# Altium PCB PCB2.PcbDoc (part 2 of 2)
Units mil, origin at the board's own origin, x right, y up, seen from the top; angles counter-clockwise.
Board outline 2244.09 x 1732.28 mil, 4 copper layers (Top Layer, GND, PWR, Bottom Layer), stack 61.58 mil thick; 44 components, 99 nets, 307 pads, 123 vias.
Unrouted connection lines stored in the file: 48.
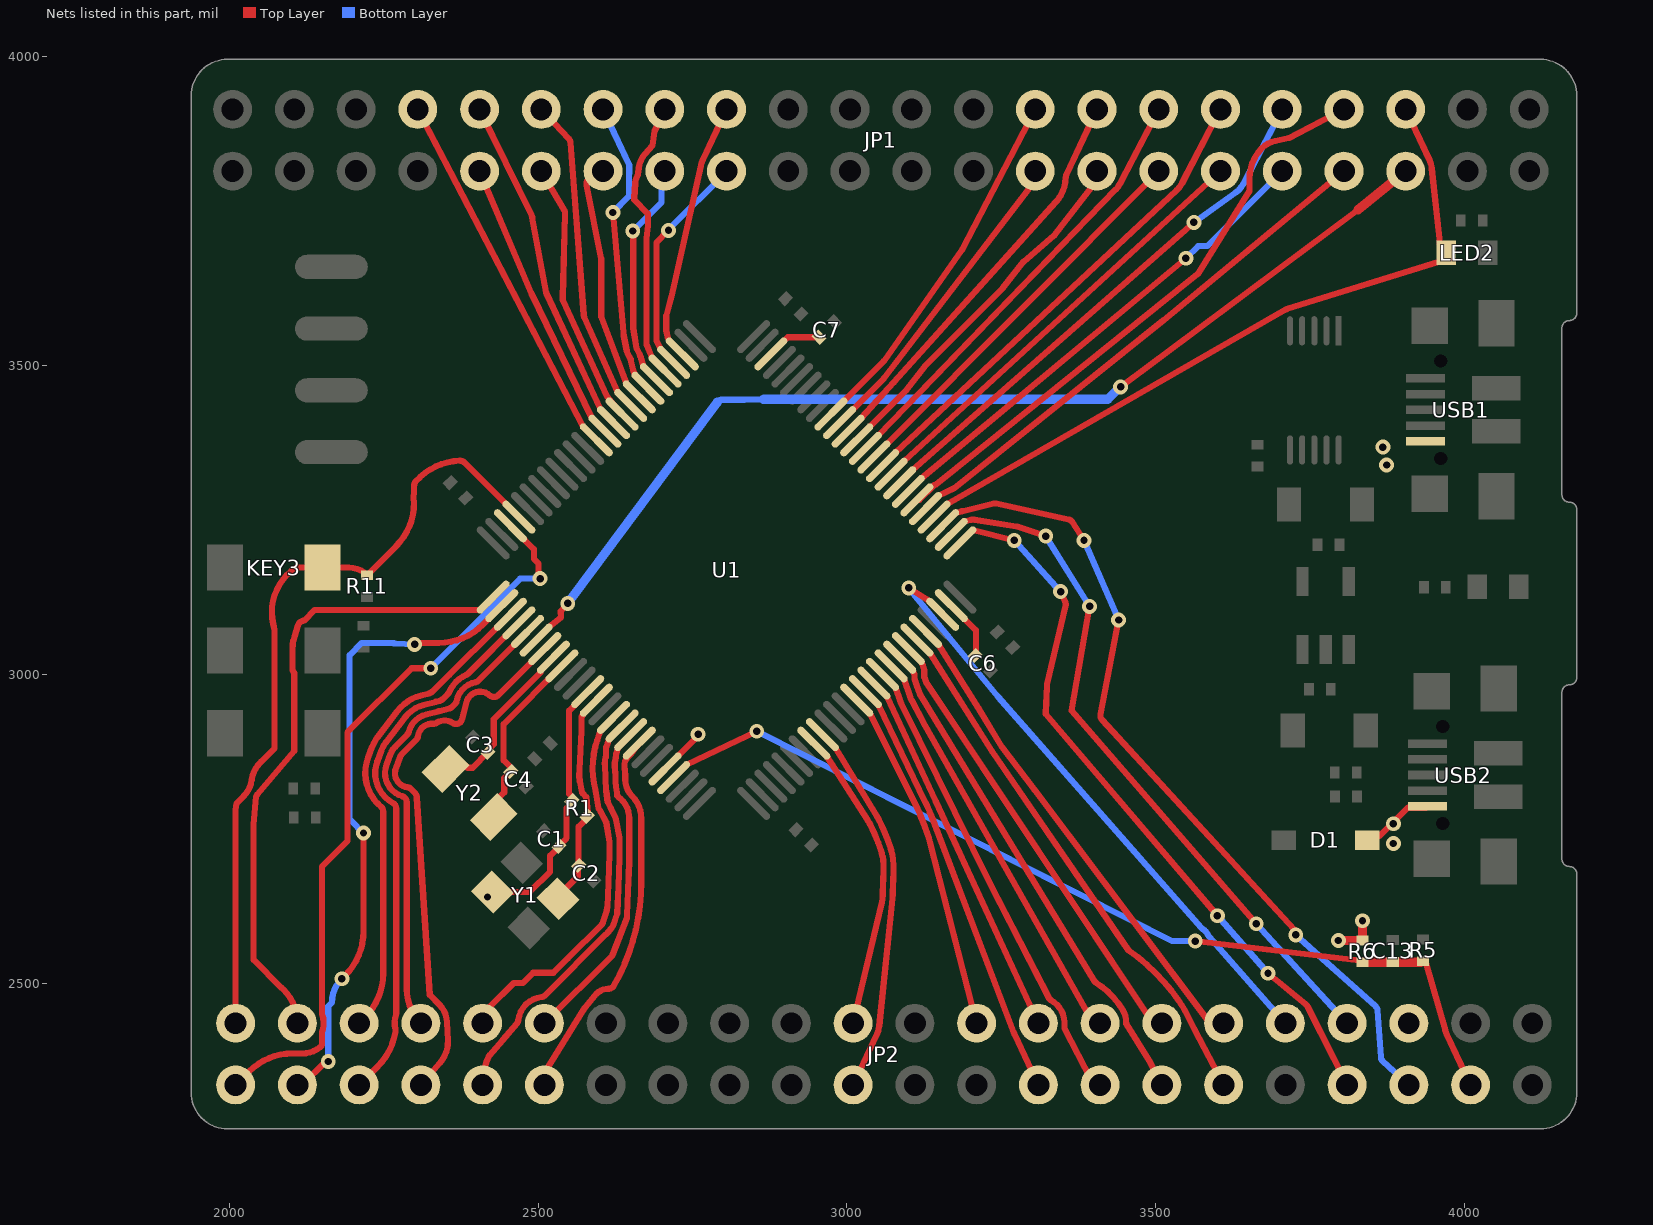
[diagram p4: the nets of this part, all layers, seen from the top]

## Via types
v1: diameter 24, hole 12, Top Layer to Bottom Layer, tented both sides, 64 vias
v2: diameter 24, hole 12, Top Layer to Bottom Layer, 59 vias

## Nets (pads, with @x,y where several pads share a name; then routed paths per layer and width w, separated by ;. In a path a pad name is that pad's centre, name@x,y a point inside that pad or via, vN(x,y) a via of type N, cw(c..) or ccw(c..) an arc to the next point about the centre after c; other vN are vias at no path point) (continued)
PB11: JP2.9 U1.48 | length 1002.7
  Top Layer w10: v2(3100,3140) 3134.21,3118.18 U1.48@3155.09,3097.3
  Bottom Layer w10: v2(3100,3140) 3244.23,2964.4 ccw(c3262,2979) 3244.73,2963.81 3574.41,2589.11 ; 3574.44,2589.07 ccw(c3581.92,2595.71) 3576.47,2587.33 cw(c3564,2568) 3584.49,2578.46 3584.89,2577.66 ccw(c3593.8,2582.21) 3586.26,2575.64 JP2.9@3710,2435
PB12: JP2.8 U1.51 | length 1193.2
  Top Layer w10: U1.51@3182.93,3212.85 3203.81,3233.73 v2(3271,3217) ; 3323.96,2982.05 3322,2936 v2(3600,2609) ; 3323.96,2982.08 cw(c3333.95,2981.62) 3324.22,2983.93 3354.22,3110.69 ; v2(3346,3134) 3353.61,3117.1 cw(c3344.49,3113) 3354.23,3110.73 ; v2(3682,2516) 3743.38,2465.34 cw(c3737.01,2457.62) 3745.93,2462.16 ; 3745.95,2462.12 JP2.8@3810,2335
  Bottom Layer w10: v2(3271,3217) v2(3346,3134) ; v2(3600,2609) v2(3682,2516)
PB13: JP2.7 U1.52 | length 1145.7
  Top Layer w10: U1.52@3169.01,3226.77 3189.89,3247.65 3199.67,3250.12 cw(c3203.81,3233.73) 3206.43,3250.43 3274.57,3239.72 cw(c3271,3217) 3278.38,3238.78 v2(3322,3224) ; v2(3393,3110) 3364,2941 v2(3663,2596)
  Bottom Layer w10: v2(3322,3224) v2(3393,3110) ; v2(3663,2596) JP2.7@3810,2435
PB14: JP2.6 U1.53 | length 1357.2
  Top Layer w10: U1.53@3155.09,3240.69 3175.97,3261.57 3185.75,3264.04 cw(c3189.89,3247.65) 3185.96,3264.09 3237.77,3276.47 cw(c3240.09,3266.74) 3242.24,3276.51 3358.94,3250.89 cw(c3356.8,3241.12) 3365.23,3246.49 v2(3384,3217) ; v2(3440,3088) 3410.73,2935.26 ccw(c3420.55,2933.38) 3413.18,2926.62 v2@3724.6,2586.89 ; v2@3724.63,2586.86 cw(c3717.23,2580.13) v2(3727,2578)
  Bottom Layer w10: v2(3384,3217) v2(3440,3088) ; v2(3727,2578) 3855.98,2462.7 cw(c3849.31,2455.25) 3859.29,2455.96 3864.72,2379.99 ; 3864.72,2379.95 ccw(c3874.69,2380.7) 3867.92,2373.34 JP2.6@3910,2335
PB15: JP1.5 LED2.2 U1.54 | length 1187.2
  Top Layer w10: U1.54@3141.17,3254.61 3162.05,3275.49 3711.04,3591.08 3712.17,3591.43 3960.25,3668.31 LED2.2@3971,3683 3960.25,3697.69 3947.26,3819.51 ccw(c3905,3815) 3943.47,3833.06 JP1.5@3905,3915
PC0: JP2.35 U1.15 | length 618.4
  Top Layer w10: JP2.35@2410,2435 cw(c2446.21,2435) 2420.61,2460.61 2460,2500 2475,2500 2491.67,2516.67 2524.67,2516.67 2548,2540 2602.62,2594.62 ccw(c2595.55,2601.69) 2605.11,2598.76 2611.13,2618.4 ccw(c2589.14,2625.14) 2611.97,2622.36 ; 2611.97,2622.4 2612.14,2623.76 2614.05,2662.31 2615.5,2709.47 2615.5,2728.53 2610.14,2760.49 2601.51,2776.8 ccw(c2591.79,2771.66) 2601.46,2776.9 ccw(c2591.79,2771.66) 2601.38,2777.03 2600.66,2778.34 2597.41,2783.1 2593.83,2807.24 2592.58,2812.14 cw(c2731.36,2847.55) 2595.63,2893.25 2601.07,2909.39 U1.15@2621.95,2930.27
PC1: JP2.36 U1.16 | length 683.5
  Top Layer w10: JP2.36@2410,2335 2410,2337.58 cw(c2510,2337.58) 2419.94,2381.05 cw(c2428.92,2376.65) 2421.36,2383.2 2442.08,2407.13 ccw(c2410,2435) 2442.32,2407.4 2465.45,2434.49 ccw(c2457.85,2440.99) 2467.78,2439.81 cw(c2510,2435) 2505.21,2477.22 ccw(c2504.01,2487.15) 2511.05,2480.05 2609.69,2578.69 2614.65,2584.03 ccw(c2539,2649.42) 2621.11,2592.35 2627.97,2612.61 2629.85,2655.48 2631.5,2702.85 2631.5,2735.15 2626.14,2764.46 2625.07,2768.18 2617.46,2783.59 2612.56,2793.05 2610.17,2811.25 2609.93,2811.92 2609.93,2817.45 ccw(c2599.93,2817.45) 2609.81,2818.97 cw(c2678.56,2829.56) 2609,2829.53 2609,2834.62 ccw(c2599,2834.62) 2608.98,2835.17 2608.98,2835.26 2607.96,2850.42 cw(c2656.75,2853.71) 2609.33,2865.68 2609.62,2866.82 ccw(c2599.93,2869.27) 2609.93,2869.23 2609.93,2881.26 2612.01,2887.26 2614.99,2895.47 U1.16@2635.87,2916.35
PC2: JP2.33 U1.17 | length 533.3
  Top Layer w10: JP2.33@2510,2435 2620.47,2545.47 2643.68,2605.7 2643.97,2609.98 2645.62,2648.63 2647.5,2696.22 2647.5,2766.75 ccw(c2604.97,2766.79) 2632.6,2799.13 2630.12,2801.25 cw(c2670.58,2840.03) 2628.17,2803.39 ; 2624.98,2835.75 cw(c2615,2835.12) 2625,2835.12 2625,2829.56 ccw(c2678.56,2829.56) 2626.02,2819.13 cw(c2616.21,2817.21) 2626.19,2817.81 2628.16,2803.43 ; 2624.98,2835.8 2623.93,2851.41 2623.92,2851.48 cw(c2656.75,2853.71) 2625.02,2862.42 ccw(c2599.93,2869.23) 2625.85,2867.29 2625.97,2868.89 cw(c2642.83,2867.63) 2626.44,2871.77 2628.91,2881.55 U1.17@2649.79,2902.43
PC3: JP2.34 U1.18 | length 620.9
  Top Layer w10: JP2.34@2510,2335 2510,2354.35 2573.88,2457.39 cw(c2610,2435) 2576.95,2461.72 2591,2479.11 cw(c2614.72,2461.07) 2614.12,2490.86 ccw(c2613.91,2500.86) 2620.99,2493.79 ccw(c2613.91,2500.86) 2622.59,2495.89 ccw(c2327.17,2663.85) 2667,2663.85 2667,2766.79 ccw(c2615.79,2766.79) 2652,2803 cw(c2678.56,2829.56) 2641,2829.56 2641,2836 2639.89,2852.5 cw(c2656.75,2853.71) 2644.77,2865.63 2649.11,2869.97 ccw(c2642,2877.01) 2649.99,2870.99 2661.18,2885.84 cw(c2669.17,2879.82) 2662.03,2886.83 U1.18@2663.71,2888.51
PC4: JP2.23 U1.33 | length 492.3
  Top Layer w10: U1.33@2946.3,2888.51 2967.18,2867.63 3033.85,2763.57 cw(c2985.01,2732.28) 3035.93,2760.05 3036.62,2758.8 cw(c2971.82,2723.06) 3037.53,2757.09 ; JP2.23@3010,2435 3056.55,2631.16 ccw(c3000.12,2644.55) 3058.09,2642.75 ccw(c3010.12,2644.28) 3058.1,2642.99 3059.25,2684.25 ccw(c2995.28,2686.17) 3059.28,2686.17 3059.28,2691.65 ccw(c2995.28,2691.65) 3056.37,2710.71 3055.97,2712.01 ccw(c3040.66,2707.34) 3055.95,2712.08 ; 3037.62,2756.91 cw(c3009.17,2742.27) 3037.66,2756.84 cw(c3023.43,2749.52) 3037.71,2756.74 cw(c3009.22,2742.18) 3037.73,2756.69 cw(c2994.98,2734.87) 3037.86,2756.44 cw(c2782.97,2626.66) 3055.86,2712.37 ; 3037.61,2756.94 ccw(c3023.39,2749.61) 3037.58,2757 ; 3055.9,2712.22 cw(c3025.36,2702.68) 3055.93,2712.14
PC5: JP2.24 U1.34 | length 610.4
  Top Layer w10: U1.34@2960.22,2902.43 2981.1,2881.55 3048.3,2770.62 cw(c2985.01,2732.28) 3049.99,2767.68 3050.63,2766.53 cw(c2971.82,2723.06) 3051.74,2764.45 ; JP2.24@3010,2335 3048.47,2416.94 ccw(c3010,2435) 3052.27,2430.6 3073.73,2636.9 ccw(c3000.12,2644.55) 3074.09,2642.25 ccw(c3010.12,2644.28) 3074.1,2642.56 3075.24,2683.77 ccw(c2995.28,2686.17) 3075.28,2686.17 3075.28,2691.65 ccw(c2995.28,2691.65) 3071.65,2715.47 3071.23,2716.8 ; 3051.77,2764.38 cw(c3023.39,2749.61) 3051.8,2764.33 cw(c3037.61,2756.94) 3051.83,2764.27 ; 3051.87,2764.19 cw(c3009.17,2742.27) 3051.9,2764.14 cw(c3023.43,2749.52) 3051.95,2764.05 cw(c3009.22,2742.18) 3052.1,2763.75 cw(c2782.97,2626.66) 3071.11,2717.19 ; 3071.15,2717.07 ccw(c3040.61,2707.51) 3071.13,2717.13 ; 3071.21,2716.89 ccw(c3025.38,2702.61) 3071.19,2716.95
PC6: JP1.16 U1.63 | length 589.6
  Top Layer w10: U1.63@3015.89,3379.89 3095.28,3459.27 3095.73,3459.72 3127.06,3500.02 3127.88,3500.95 3251.55,3624.62 3252.25,3625.32 3286.26,3668.38 3335.52,3710.59 3336.24,3711.31 3406.21,3801.3 3406.21,3805.36 JP1.16@3405,3815
PC7: JP1.15 U1.64 | length 666.2
  Top Layer w10: U1.64@3001.98,3393.81 3022.85,3414.68 3075.86,3472.9 3338.76,3765.42 ccw(c3294.4,3805.37) 3353.55,3797.3 3355.1,3808.71 JP1.15@3405,3915
PC8: JP1.18 U1.65 | length 520.7
  Top Layer w10: U1.65@2988.06,3407.72 3059.39,3479.06 3059.86,3479.53 3306.3,3801.15 3306.3,3805.2 JP1.18@3305,3815
PC9: JP1.17 U1.66 | length 597.9
  Top Layer w10: U1.66@2974.14,3421.64 3059.77,3507.28 3186.51,3687.5 3186.81,3688.09 JP1.17@3305,3915
PC10: JP1.27 U1.78 | length 420.9
  Top Layer w10: 2715.92,3611.63 2707.36,3580.66 2707.36,3557.54 2709.44,3546.88 2712.43,3539.96 U1.78@2733.31,3519.08 ; 2715.93,3611.65 cw(c2725.7,3609.55) 2715.94,3611.73 2763.53,3824.28 cw(c2805,3815) 2766.53,3833.06 JP1.27@2805,3915
PC11: JP1.28 U1.79 | length 367.2
  Top Layer w10: v2(2711,3719) 2691.36,3699.36 2691.36,3541.21 2698.51,3526.04 U1.79@2719.39,3505.16
  Bottom Layer w10: v2(2711,3719) 2711,3720 2805,3814 JP1.28@2805,3815
PC12: JP1.29 U1.80 | length 455.3
  Top Layer w10: JP1.29@2705,3915 2688.31,3879.45 2684.9,3856.61 2672.97,3842.93 ccw(c2705,3815) 2662.86,3820.46 2661.5,3809.95 ccw(c2705.22,3788.62) 2657.1,3795.82 2655.55,3771.3 2655.67,3768.73 2677.76,3746.29 2677.76,3727.24 2675.36,3705.99 2675.36,3534.58 2684.59,3512.12 U1.80@2705.47,3491.24
PC13: JP2.38 U1.7 | length 905.5
  Top Layer w10: JP2.38@2310,2335 2340.71,2370.43 ccw(c2299.93,2405.78) 2352.87,2395.31 ccw(c2305.69,2404.64) 2353.74,2406.69 2352.46,2436.81 ccw(c2310,2435) 2340.15,2464.95 2324.34,2480.87 2303.31,2800.41 2303.31,2800.83 ccw(c2293.31,2800.92) 2300.36,2808.01 2294.06,2814.32 ccw(c2286.99,2807.25) 2288.22,2817.17 cw(c2291,2840) 2269.45,2848.05 2276.01,2865.6 cw(c2291,2860) 2279.69,2871.31 2302.42,2894.04 ccw(c2295.38,2901.15) 2305.3,2899.9 cw(c2328.14,2897.14) 2329.62,2920.09 2329.67,2920.08 ccw(c2330.27,2930.07) 2335.65,2921.64 cw(c2348.17,2902.35) 2361.19,2921.31 ccw(c2366.82,2929.58) 2376.49,2927.05 2383.74,2954.78 cw(c2406,2949) 2421.52,2965.97 ccw(c2428.23,2973.39) 2435.26,2966.29 U1.7@2510.6,3041.62
PC14: C3.2 U1.8 Y2.1 | length 280.7
  Top Layer w10: Y2.1@2350.03,2846.97 2355.59,2852.54 2381.93,2852.54 2385.62,2848.85 2393.9,2848.85 C3.2@2418.52,2873.47 2418.52,2877.38 2428,2886.86 2428,2927.25 2502.73,3001.99 2503.29,3002.55 2503.29,3006.48 U1.8@2524.52,3027.7
PC15: C4.2 U1.9 Y2.2 | length 284.2
  Top Layer w10: Y2.2@2444.97,2787.03 2435.29,2796.71 2435.29,2799.18 2444.97,2808.86 2444.97,2832.02 2456.87,2843.92 2456.87,2847.98 2444,2860.85 2444,2919.35 U1.9@2538.44,3013.78
PD0: JP1.30 U1.81 | length 370.9
  Top Layer w10: v2(2653,3718) 2654,3717 2654,3560.38 2659.36,3527.95 2664.41,3518.27 2665.41,3515.3 2670.67,3498.2 U1.81@2691.55,3477.32
  Bottom Layer w10: v2(2653,3718) 2699.72,3764.72 2699.72,3809.72 JP1.30@2705,3815
PD1: JP1.31 U1.82 | length 484.2
  Top Layer w10: v2(2621,3748) 2638,3553.75 2638.59,3548.49 2643.36,3524.03 2644.42,3520.27 2649.86,3510.2 2653.77,3493.26 2656.75,3484.28 U1.82@2677.63,3463.4
  Bottom Layer w10: JP1.31@2605,3915 2647.37,3824.75 2647.49,3815.58 cw(c2605,3815) 2647.5,3814.97 2647.49,3811.65 2647,3808.5 2647,3774 v2(2621,3748)
PD2: JP1.32 U1.83 | length 398.7
  Top Layer w10: JP1.32@2605,3815 2581.96,3801.38 2578.13,3797.56 2578.13,3792.42 2602,3673.61 2602,3581.04 2602,3579.23 2642.83,3470.36 U1.83@2663.71,3449.48
PD3: JP1.33 U1.84 | length 518.9
  Top Layer w10: JP1.33@2505,3915 2549.59,3867.57 cw(c2542.3,3860.72) 2552.27,3861.52 2573.87,3581.72 ccw(c2583.84,3582.49) 2574.68,3578.46 2628.91,3456.44 U1.84@2649.79,3435.56
PD4: JP1.34 U1.85 | length 418.7
  Top Layer w10: JP1.34@2505,3815 2542.1,3751.78 2543.48,3749.43 2543.48,3746.58 2539.63,3608.9 2539.62,3608.76 2539.62,3606.43 2612.01,3449.44 U1.85@2628.85,3428.67
PD5: JP1.35 U1.86 | length 557.2
  Top Layer w10: JP1.35@2405,3915 2489.39,3743.23 cw(c2480.42,3738.82) 2490.25,3740.67 2512.77,3619.21 ccw(c2522.6,3621.07) 2513.52,3616.88 ; 2513.53,3616.85 2601.07,3428.6 U1.86@2621.95,3407.72
PD6: JP1.36 U1.87 | length 469.5
  Top Layer w10: JP1.36@2405,3815 2488.92,3617.19 ccw(c2498.11,3621.14) 2489.09,3616.81 ; 2489.11,3616.77 2587.15,3414.68 U1.87@2608.03,3393.81
PD7: JP1.37 U1.88 | length 609.5
  Top Layer w10: JP1.37@2305,3915 2367.31,3795.37 ; 2367.33,3795.34 2573.23,3400.77 U1.88@2594.11,3379.89
PD8: JP1.8 U1.55 | length 871.6
  Top Layer w10: U1.55@3127.25,3268.53 3148.13,3289.41 3174.12,3301.8 3177.62,3304.26 3513.11,3573.57 JP1.8@3805,3815
PD9: JP1.7 U1.56 | length 966.2
  Top Layer w10: U1.56@3113.33,3282.45 3113.45,3282.45 3117.26,3282.45 3141.13,3306.32 3144.22,3307.62 3568.13,3648.33 3568.51,3648.71 3569.33,3649.53 3569.94,3650.51 3651.75,3782.47 3651.85,3803.07 cw(c3722.64,3802.72) 3671.49,3851.65 cw(c3702.2,3822.28) 3693.62,3863.9 3715.57,3868.42 JP1.7@3805,3915
PD10: JP1.10 U1.57 | length 801.7
  Top Layer w10: U1.57@3099.41,3296.37 3120.29,3317.25 v2(3549,3674)
  Bottom Layer w10: v2(3549,3674) 3568.68,3693.68 3583.68,3693.68 JP1.10@3705,3815
PD11: JP1.9 U1.58 | length 874.5
  Top Layer w10: U1.58@3085.49,3310.29 3106.37,3331.17 v2(3562,3732)
  Bottom Layer w10: v2(3562,3732) 3629.72,3780.43 ccw(c3605,3815) 3642.69,3795.37 JP1.9@3705,3915
PD12: JP1.12 U1.59 | length 724.9
  Top Layer w10: U1.59@3071.57,3324.21 3092.45,3345.09 JP1.12@3605,3815
PD13: JP1.11 U1.60 | length 801.8
  Top Layer w10: U1.60@3057.65,3338.13 3078.53,3359.01 3533.99,3783.93 ccw(c3505,3815) 3542.69,3795.37 JP1.11@3605,3915
PD14: JP1.14 U1.61 | length 653.5
  Top Layer w10: U1.61@3043.73,3352.05 3064.61,3372.93 JP1.14@3505,3815
PD15: JP1.13 U1.62 | length 730.8
  Top Layer w10: U1.62@3029.81,3365.97 3050.69,3386.85 3435.57,3785.48 ccw(c3405,3815) 3442.69,3795.37 JP1.13@3505,3915
PE0: JP2.43 KEY3.1 R11.2 U1.97 | length 1286.2
  Top Layer w10: JP2.43@2010,2435 2010,2780.19 cw(c2047.03,2780.2) 2011.63,2791.08 2022.91,2802.42 ccw(c1989.98,2835.15) 2036,2829 cw(c2085.1,2822.07) 2051.31,2858.36 2052.06,2859.07 2052.11,2859.11 2073,2880 2073,3071.99 2070.89,3081.07 cw(c2155.29,3100.64) 2107.52,3172.92 KEY3.1@2150.61,3172.92 2193.55,3172.92 cw(c2193.55,3131.26) R11.2@2223,3160.71 2269.71,3207.42 ccw(c2199,3278.13) 2299,3278.13 ccw(c2289,3278.13) 2298.87,3279.71 2298.29,3283.36 cw(c2321,3287) 2298.7,3292.63 ccw(c2289,3295.06) 2299,3295.06 2299,3305.78 cw(c2309,3305.73) 2301.52,3312.37 cw(c2377.14,3244.84) 2372.76,3346.13 cw(c2373.17,3336.13) 2380.24,3343.21 2447.96,3275.49 U1.97@2468.84,3254.61
PE1: JP2.44 U1.98 | length 1205.3
  Top Layer w10: JP2.44@2010,2335 2031.71,2356.71 cw(c2102.42,2286) 2102.42,2386 2118,2386 ccw(c2118,2431.25) 2146.24,2395.89 ccw(c2118,2431.25) 2146.7,2396.27 2150,2399.56 2150,2420.65 ccw(c2110,2435) 2152.35,2431.42 ccw(c2110,2435) 2151.91,2442.03 ccw(c2110,2435) 2150,2449.35 2150,2634.4 2150,2689.05 2191,2730.05 2191,2886.16 2191,2906 2295,3010 v2(2326,3010) ; U1.98@2454.92,3240.69 2464.99,3230.62 2493,3202.61 2493,3187 2500.32,3179.68 2500.32,3157.68 v2(2503,3155)
  Bottom Layer w10: v2(2326,3010) 2471,3155 v2(2503,3155)
PE2: JP2.41 U1.1 | length 1030.8
  Top Layer w10: JP2.41@2110,2435 ccw(c2032.75,2435) 2087.37,2489.63 2087.28,2489.63 2084.12,2492.79 2039,2537.91 2039,2601.71 2039,2748.91 2039,2757.2 2043,2802.19 ccw(c1989.98,2835.15) 2044.85,2805.38 2105,2875.73 2105,3002 cw(c2112.24,3009.24) 2102,3009.24 2102,3041.13 cw(c2166.87,3041.13) 2105.06,3060.8 2111,3079.48 cw(c2121.48,3076.14) 2120.99,3087.13 2138.12,3104.26 2406.2,3104.26 U1.1@2427.08,3125.14
PE3: JP2.42 U1.2 | length 1026.8
  Top Layer w10: JP2.42@2110,2335 2118.21,2335 2156.21,2373 v2(2160,2373) ; v2(2182,2507) 2187.71,2512.71 ccw(c2117,2583.42) 2217,2583.42 v2(2217,2743) ; v2(2299.75,3048.51) 2302.24,3051 2339.36,3051 ccw(c2339.36,3151) 2410.07,3080.29 U1.2@2441,3111.22
  Bottom Layer w10: v2(2160,2373) 2160,2462.37 2166,2468.37 cw(c2220.63,2468.37) v2(2182,2507) ; v2(2217,2743) 2197.39,2762.61 2194.46,2765.54 2194.46,3031.29 2214.17,3051 2261.94,3051 cw(c2261.94,3041) 2264.38,3050.7 ccw(c2270,3073) 2267.73,3050.11 ccw(c2270,3073) 2268.87,3050.03 v2(2299.75,3048.51)
PE4: JP2.39 U1.3 | length 785.1
  Top Layer w10: JP2.39@2210,2435 2219.71,2444.71 ccw(c2149,2515.42) 2249,2515.42 2249,2777.9 ccw(c2239,2777.9) 2245.43,2785.56 cw(c2291,2840) 2224.45,2864.73 ; 2224.47,2864.79 cw(c2239.48,2859.25) 2224.49,2864.85 2231.05,2882.4 cw(c2246.04,2876.8) 2231.07,2882.47 cw(c2291,2860) 2240.11,2898.81 ; 2240.14,2898.85 2271.67,2940.17 ; 2271.69,2940.21 cw(c2328.14,2897.14) 2310.43,2965.89 2323.72,2969.35 ccw(c2321.18,2979.02) 2328.22,2971.91 2356.06,2999.47 cw(c2406,2949) 2356.13,2999.54 2434.04,3076.42 U1.3@2454.92,3097.3
PE5: JP2.40 U1.4 | length 888.1
  Top Layer w10: JP2.40@2210,2335 2240.71,2365.71 ccw(c2170,2436.42) 2268.84,2421.26 ccw(c2258.95,2422.74) 2268.69,2425.05 cw(c2310,2435) 2269.54,2447.99 ccw(c2260,2450.99) 2270,2450.95 2270,2782.87 ccw(c2260,2782.87) 2264.78,2791.65 cw(c2291,2840) 2239.45,2859.17 ; 2239.46,2859.19 cw(c2254.47,2853.65) 2239.48,2859.25 2246.04,2876.8 ; 2246.05,2876.84 cw(c2291,2860) 2252.86,2889.14 2284.39,2930.47 cw(c2328.14,2897.14) 2314.43,2950.4 2334.2,2955.54 cw(c2348.17,2902.35) 2334.42,2955.6 2340.76,2957.25 ccw(c2338.25,2966.93) 2345.3,2959.84 2353.62,2968.16 ccw(c2346.51,2975.19) 2355.65,2971.13 cw(c2406,2949) 2383.88,2999.35 ccw(c2379.81,3008.49) 2386.84,3001.38 U1.4@2468.84,3083.38
PE6: JP2.37 U1.5 | length 768
  Top Layer w10: 2261.02,2871.2 2254.47,2853.65 ccw(c2269.45,2848.05) 2254.45,2853.6 ccw(c2291,2840) 2279.87,2802.62 cw(c2277,2793.04) 2287,2793.04 2287,2490.53 ccw(c2365.53,2490.53) JP2.37@2310,2435 ; 2261.03,2871.22 cw(c2291,2860) 2268.33,2882.58 cw(c2279.69,2871.31) 2268.37,2882.63 2287.69,2902.01 ccw(c2280.61,2909.07) 2290.3,2906.6 cw(c2328.14,2897.14) 2318.42,2934.91 2338.27,2940.07 cw(c2348.17,2902.35) 2338.44,2940.12 2356.05,2944.69 ccw(c2353.53,2954.37) 2360.58,2947.29 2364.98,2951.69 ccw(c2357.9,2958.74) 2367.57,2956.21 2368.27,2958.86 cw(c2406,2949) 2398.21,2987.21 ccw(c2396.16,2997) 2403.19,2989.89 U1.5@2482.76,3069.46
PE7: JP2.19 U1.38 | length 563.4
  Top Layer w10: U1.38@3015.89,2958.11 3036.77,2937.23 3110.23,2790.62 cw(c2782.97,2626.66) 3132.13,2736.52 cw(c3101.63,2726.81) 3132.15,2736.45 ; 3132.17,2736.36 cw(c3101.66,2726.74) 3132.19,2736.31 cw(c3086.4,2721.9) 3132.21,2736.26 cw(c3055.88,2712.28) 3132.27,2736.05 ; 3132.29,2735.98 ccw(c3101.76,2726.42) 3132.28,2736.04 ; 3132.34,2735.82 cw(c2782.97,2626.66) 3132.39,2735.69 3132.8,2734.34 cw(c2995.28,2691.65) 3134.74,2727.53 JP2.19@3210,2435
PE8: JP2.18 U1.39 | length 698.6
  Top Layer w10: U1.39@3029.81,2972.02 3050.69,2951.15 3127.14,2792.48 cw(c2782.97,2626.66) 3140.07,2762.41 3270.28,2419.9 ccw(c3310,2435) 3271.53,2416.94 JP2.18@3310,2335
PE9: JP2.17 U1.40 | length 613.6
  Top Layer w10: U1.40@3043.73,2985.94 3064.61,2965.06 3143.92,2794.41 cw(c2782.97,2626.66) 3144.29,2793.62 JP2.17@3310,2435
PE10: JP2.16 U1.41 | length 760.9
  Top Layer w10: U1.41@3057.65,2999.86 3078.53,2978.98 3086.76,2955.51 3088.64,2951.49 3232.3,2660.56 3328.06,2474.5 3329.17,2473.4 3330.15,2472.41 cw(c3310,2435) 3352.25,2430.44 3352.25,2429.93 3352.25,2427.51 3396.69,2341.18 3399.5,2338.36 JP2.16@3410,2335
PE11: JP2.15 U1.42 | length 675.7
  Top Layer w10: U1.42@3071.57,3013.78 3092.45,2992.9 3102.76,2962.14 3104.64,2958.12 3125.8,2917.94 3395.64,2441.02 3398.46,2438.2 JP2.15@3410,2435
PE12: JP2.14 U1.43 | length 818.6
  Top Layer w10: U1.43@3085.49,3027.7 3106.37,3006.82 3109.36,2999.91 3109.36,2992.81 3113.34,2980.93 3118.39,2967.81 3118.76,2966.62 3401.39,2502.48 3403.04,2500.82 3403.95,2500.26 cw(c3332.54,2387.83) 3446.3,2457.1 cw(c3410,2435) 3452.49,2434.2 3489.53,2374.3 JP2.14@3510,2335
PE13: JP2.13 U1.44 | length 740.3
  Top Layer w10: U1.44@3099.41,3041.62 3120.29,3020.74 3123.28,3013.83 3125.36,3006.53 3125.36,2995.42 3127.83,2988.03 3491.84,2440.92 3494.68,2438.08 JP2.13@3510,2435
PE14: JP2.12 U1.45 | length 879.3
  Top Layer w10: U1.45@3113.33,3055.54 3134.21,3034.66 3235.09,2875.51 3455.53,2553.57 cw(c3261.1,2277.47) 3537.09,2472.04 cw(c3413.37,2384.82) 3547.62,2454.76 3547.75,2454.52 3562.78,2425.66 JP2.12@3610,2335
PE15: JP2.11 U1.46 | length 805.4
  Top Layer w10: U1.46@3127.25,3069.46 3148.13,3048.58 3213.6,2944.47 3251.09,2882.14 3302.89,2814.03 3583.55,2441.19 3586.4,2438.33 JP2.11@3610,2435
PH0: C1.2 R1.1 U1.12 Y1.1 | length 427.6
  Top Layer w10: Y1.1@2426.11,2647.57 2427.5,2646.18 2453.83,2646.18 2455.23,2647.57 2486.57,2647.57 2519.23,2680.23 2519.23,2706.13 2534.05,2720.95 2534.05,2722.91 2546,2734.86 2546,2783.05 2554.21,2791.25 R1.1@2554.21,2795.32 ; R1.1@2555.73,2796.71 2555.73,2800.64 2550,2806.38 2550,2941.34 2580.19,2971.53 U1.12@2580.19,2972.02
  other v2: 2417.87,2639.37
PH1: C2.2 R1.2 U1.13 Y1.3 | length 352.7
  Top Layer w10: Y1.3@2529.89,2638.43 2564.09,2672.62 2564.09,2689.14 C2.2@2565.48,2690.53 2565.48,2694.59 2566.87,2695.98 2565.48,2697.38 2565.48,2753.13 R1.2@2580.65,2768.31 ; R1.2@2579.26,2770.26 2580.65,2775.72 2577.74,2801.27 2571.88,2807.13 2570.91,2809.03 2569.08,2817.15 cw(c2670.58,2840.03) 2566.71,2845.96 2570.25,2908.02 2570.25,2930.31 2573.23,2937.23 U1.13@2594.11,2958.11
VBAT: JP1.6 U1.6 | length 1730
  Top Layer w10: U1.6@2496.68,3055.54 2517.56,3076.42 2537,3092 2536.47,3102.2 v2(2548,3115) ; v2(3443.26,3465.64) 3824.14,3749.52 ccw(c3756.51,3840.25) 3827.81,3752.38
  Top Layer w15: 3827.81,3752.38 JP1.6@3905,3815
  Bottom Layer w10: 2789.89,3440.82 cw(c2797.9,3434.83) 2790.83,3441.9 2792.49,3443.24 cw(c2797.9,3434.83) 2797.59,3444.82 2832.75,3444.82 ccw(c2831.87,3467.81) 2834.54,3444.96 2865,3444.96 ; v2@3442.64,3465.64 v2(3443.26,3465.64)
  Bottom Layer w15: v2(2548,3115) 2789.89,3440.82 ; 2865,3444.96 2865.38,3445.34 3422.34,3445.34 v2@3442.64,3465.64
VCAP_1: C6.2 U1.49 | length 98.3
  Top Layer w10: U1.49@3169.01,3111.22 3208.87,3071.36 3208.87,3031.92 C6.2@3207.48,3030.53
  Top Layer w15: C6.2@3207.48,3030 C6.2@3207.48,3030.53
VCAP_2: C7.2 U1.73 | length 90.5
  Top Layer w10: U1.73@2876.7,3519.08 2877.19,3519.08 2904.06,3545.95 2948.1,3545.95 2949.49,3547.34 2953.55,3547.34 C7.2@2954.95,3545.95
VCC: D1.1 USB1.1 USB2.1 | length 118.5
  Top Layer w10: D1.1@3842.5,2731 3849.5,2738 3862.47,2738 3882.47,2758 v1(3885,2758) 3885,2760.53 3908.47,2784 USB2.1@3937.57,2784
  other v1: 3885,2726 3874,3339 3868.05,3368
VDDA: C13.2 JP2.4 R5.1 R6.1 U1.22 | length 1531
  Top Layer w10: U1.22@2719.39,2832.83 2740.27,2853.71 v2(2854,2908) ; v2(3564,2568) 3830.15,2536.44 R6.1@3835,2533.57 ; R5.1@3933,2535.28 3937.84,2532.41 3969.15,2423.28 ccw(c4010,2435) 3971.53,2416.94 JP2.4@4010,2335
  Top Layer w15: R6.1@3835,2533.57 R5.1@3929.32,2533.57
  Bottom Layer w10: v2(2854,2908) 3527,2568 v2(3564,2568)
VREF+: JP2.5 R6.2 U1.21 | length 149.4
  Top Layer w10: U1.21@2705.47,2846.75 2705.47,2847.24 2759,2900.77 v1(2759,2903)
  Top Layer w15: v1(3796,2569) R6.2@3835,2569 v1(3835,2601)
pads on no net: U2.4 U2.5 U2.6 U3.4 USB1.0 USB1.4 USB2.0 USB2.4

## Polygon pours and split planes (outlines as drawn)
GND on Bottom Layer "GND_L04_P001" (solid, remove dead copper, pour order 1): 3003,4246 1422,4237 1487,2435 1629,1923 2513,1852 4149,1815 4710,1957 5033,3735 4725,4641
GND on Top Layer "GND_L01_P000" (solid, remove dead copper, pour order 0): 2892,4094 1576,4071 1803,2035 4360,2068 4489,4140
GND on GND (split plane): 4127.54,3965.77 4131.97,3964.71 4136.18,3962.97 4140.06,3960.58 4143.53,3957.62 4146.49,3954.16 4148.87,3950.27 4150.62,3946.06 4151.68,3941.63 4152,3937.61 4151.95,3937.09 4151.95,3598.91 4149,3597.45 4144.42,3594.39 4140.28,3590.76 4136.65,3586.62 4133.6,3582.05 4131.16,3577.11 4129.39,3571.89 4128.32,3566.49 4127.97,3561.21 4127.95,3561 4127.95,3290.84 4127.97,3290.64 4128.32,3285.35 4129.39,3279.95 4131.16,3274.74 4133.6,3269.8 4136.65,3265.22 4140.28,3261.08 4144.42,3257.45 4149,3254.39 4151.95,3252.94 4151.95,3008.91 4149,3007.45 4144.42,3004.39 4140.28,3000.76 4136.65,2996.62 4133.6,2992.05 4131.16,2987.11 4129.39,2981.89 4128.32,2976.49 4127.97,2971.21 4127.95,2971 4127.95,2700.84 4127.97,2700.64 4128.32,2695.35 4129.39,2689.95 4131.16,2684.74 4133.6,2679.8 4136.65,2675.22 4140.28,2671.08 4144.42,2667.45 4149,2664.39 4151.95,2662.94 4151.95,2322.91 4152,2322.39 4151.68,2318.37 4150.62,2313.94 4148.87,2309.73 4146.49,2305.84 4143.53,2302.38 4140.06,2299.42 4136.18,2297.03 4131.97,2295.29 4127.54,2294.23 4123.51,2293.91 4122.99,2293.95 1997.01,2293.95 1996.48,2293.91 1992.46,2294.23 1988.03,2295.29 1983.82,2297.03 1979.94,2299.42 1976.47,2302.38 1973.51,2305.84 1971.13,2309.73 1969.38,2313.94 1968.32,2318.37 1968,2322.39 1968.05,2322.91 1968.05,3937.09 1968,3937.61 1968.32,3941.63 1969.38,3946.06 1971.13,3950.27 1973.51,3954.16 1976.47,3957.62 1979.94,3960.58 1983.82,3962.97 1988.03,3964.71 1992.46,3965.77 1996.49,3966.09 1997.01,3966.05 4122.99,3966.05 4123.51,3966.09
VCC on PWR (split plane): 4137.95,3290.84 4138.34,3285.82 4139.52,3280.92 4141.45,3276.27 4144.08,3271.98 4147.35,3268.15 4151.18,3264.87 4155.47,3262.24 4160.13,3260.32 4161.95,3259.88 4161.95,3001.97 4160.13,3001.53 4155.47,2999.6 4151.18,2996.97 4147.35,2993.7 4144.08,2989.87 4141.45,2985.57 4139.52,2980.92 4138.34,2976.02 4137.95,2971 4137.95,2700.84 4138.32,2696.09 3857.18,2696.09 3853.09,2700.18 3853.09,2836.82 3896.13,2879.87 3897.74,2881.96 3898.74,2884.39 3899.09,2887 3899.09,3233 3898.74,3235.61 3897.74,3238.04 3896.13,3240.13 3821.09,3315.18 3821.09,3362.82 3870.18,3411.91 4137.95,3411.91
VREF+ on PWR (split plane): 2786.91,2945.82 2786.91,2784 2787.26,2781.39 2788.26,2778.96 2789.87,2776.87 2940.87,2625.87 2942.96,2624.26 2945.39,2623.26 2948,2622.91 3859.82,2622.91 3953.91,2528.82 3953.91,2283.96 2700.09,2283.96 2700.09,2946.82 2705.18,2951.91 2780.82,2951.91
3V3 on PWR (split plane): 151 vertices, not listed, extent 1958,2283.91 4162,3976.09

## Keep-outs
Keep-Out Layer:
  the board outline again, w6

## Other copper
Top Layer:
  pour cut-out: 3740,3318 3876.19,3319.26 3864,3171 3806,3158 3817.24,3021.26 3891,2964 3876,2859 3778,2872 3737.6,2994.66 3727,3227
  region net 3V3: 3661.98,3210 3681,3136 3725.84,3123.58 3742.44,3169.23 3709,3214
  region net GND: 3914,2895 3902,2900 3852,2900 3852,2918 3864.34,2905.66 3864.34,2876.44 3896.44,2876.44 3911,2884
  region net VCC: 3861.17,3383.97 3861.2,3384 3916.8,3384 3916.8,3368 3896.34,3352
  region net VCC: 3901.16,3383.99 3857.71,3383.99 3848.85,3373.88 3851.15,3324.12 3860.85,3318.47 3891.52,3320.06
  region net 5V: 3726.04,3029.75 3724.86,3039.51 3685,3025 3681.44,2936.55 3687.11,2930.88 3724.86,2930.88
  region net GND: 3776,2964 3776,2939.1 3780.57,2934.52 3808.7,2934.52 3808.7,2885.91 3818.18,2876.44 3864.34,2876.44 3864.34,2962.34 3865.56,2963.56 3865.26,2963.87 3838.05,2963.87 3822.46,2979.46
  region net GND: 3783.31,3191.31 3781.8,3191.31 3776.86,3186.38 3776.86,3171.43
  region net 3V3: 3751,3201.95 3760.92,3201.95 3762.67,3200.19 3759.26,3196.78 3759.26,3192.53
  region net 3V3: 3762.67,3200.19 3762.67,3185.66 3749.52,3172.51 3743.93,3178.11 3743.93,3197.61
  region net GND: 3785.61,3194.53 3779.31,3188.24 3779.31,3182.83 3780.3,3181.84 3784.62,3186.17 3786.98,3186.17
  region net GND: 3776.5,3306.94 3758.06,3306.94 3758,3307 3758,3250 3767.59,3250 3776.5,3241.09
  region net GND: 3857.96,3244.15 3857.96,3195.78 3858.3,3195.44 3851.68,3188.82 3797.71,3188.82 3797.71,3228.02 3826.69,3257 3829,3257
  region net GND: 3810,3307 3776.44,3307 3776.5,3306.94 3776.5,3241.09 3798.22,3219.37 3813.16,3234.3 3821.98,3234.3
  region net GND: 3786.55,3007.98 3787.1,3007.98 3799.59,2995.5 3781.14,2995.5
  region net GND: 3764.25,3012.52 3765.97,2998.03 3782.98,2981.02 3784.9,2982.95 3784.9,3001.68
  region net GND: 3788,2999.5 3822.5,2999.5 3826,2994 3843,2965.67 3843,2958 3793.5,2958 3787.5,2964 3776,2964
  region net GND: 3788,2999.5 3793.5,2999.5 3801,2992 3800,2991 3800,2963 3777,2963 3776,2964 3776,3012
  region net GND: 3763.23,3012.26 3789.2,2986.74 3788,3012.26
  region net GND: 3787.45,3196.98 3782.37,3191.9 3782.37,3181.23 3786.96,3181.23 3792.34,3186.62
  region net GND: 3763,3067.18 3763,3012.82 3763.36,3012.46 3763.6,3012.69 3768.89,3012.69 3768.89,3064.22 3772.54,3067.87
  region net GND: 3786.27,3188.75 3764,3166.48 3764,3012 3788,3012 3788,3177 3811,3200 3811,3206
  region net GND: 3813.19,3242.6 3797.59,3227 3787,3227 3787,3190 3815,3190 3815,3238 3814,3239
  region net GND: 3810,3307 3857,3307 3859,3305 3858,3304 3858,3243 3856,3243 3842,3229 3814,3229 3811,3226
  region net 3V3: 3699.65,3306.54 3618.35,3301.46 3615.09,3223.1 3628.19,3210 3695.77,3210
  region net 3V3: 3739.69,3229.1 3754.49,3229.1 3758.58,3225 3758.39,3224.81 3758.39,3181.37 3750.79,3181.37 3739.69,3170.27
  region net 3V3: 3751.32,3123.18 3751.32,3164.8 3751,3165.11 3751,3238.78 3693.65,3296.13 3693.65,3197.69 3725.84,3165.5 3725.84,3123.58
  region net 5V: 3689,2880 3689.75,2880.75 3701.1,2880.75 3701.1,2770.12 3699.58,2768.6 3699.44,2768.73 3675.28,2768.73
  region net 5V: 3714.36,2951.89 3702.66,2940.19 3717.57,2940.19 3724.46,2933.3
  region net 5V: 3715.28,2940.19 3680.19,2940.19 3669.37,2929.37 3669.37,2896.45 3695.57,2896.45 3703.43,2904.31
  region net 5V: 3719,2984 3719,2973.51 3714.71,2969.22
  region net 5V: 3724.27,3067.98 3723,3013 3716.04,2973.14 3751.76,2972.34 3752.56,2973.14 3750.27,2975.43 3750.27,3067.98
  region net 5V: 3714.36,2934.44 3714.36,2969.35 3719.18,2974.16 3747.81,2974.16 3738.44,2964.8 3738.44,2936.04 3734.56,2932.16
  region net 5V: 3690,2779 3692.65,2776.35 3692.65,2782.25
  region net 5V: 3715.95,2760.74 3716.83,2759.86 3727,2759.86 3727,2746.5 3726.57,2746.93 3712.12,2746.93
  region net 5V: 3718.64,2768.22 3727,2759.86 3727,2756 3715.98,2756 3713.25,2753.27
  region net 5V: 3712.12,2755.62 3726.62,2755.62 3727,2756 3727,2737 3709.36,2737 3708.12,2738.23
  region net 5V: 3702,2773 3713.86,2773 3723.42,2763.44 3703.08,2743.1 3695.96,2743.1
  region net 5V: 3683.5,2778 3685.37,2776.13 3696.13,2776.13 3696.13,2763.44 3695.61,2762.92
  region net 5V: 3688,2806.5 3691.91,2806.5 3691.96,2806.55 3691.96,2768.65 3686.22,2762.92
  region net 5V: 3676,2772 3695.74,2772 3712.12,2755.62 3712.12,2738.23 3708.12,2738.23 3694.22,2724.33 3688.31,2730.24 3676.49,2730.24 3676.49,2731.46 3668.67,2739.28 3669.02,2739.63 3669.02,2759.44
  region net 5V: 3680,2795 3689,2786 3689,2762.05 3703.08,2762.05 3684.83,2743.8 3696.83,2743.8 3701.35,2748.32
  region net 5V: 3691,2784 3691,2766 3703,2754 3683,2754 3683,2765 3676,2772
  region net 5V: 3679,2841 3690,2830 3690,2779 3693,2776 3689,2772 3676,2772
  region net 5V: 3674,2865 3674,2863 3680,2857 3686.5,2863.5 3679,2871
  region net 5V: 3674,2895 3688,2909 3704.97,2909 3704.97,2894.03 3709,2890 3700,2881 3700,2880 3689,2880 3689,2874 3693,2870 3680,2857 3679,2857 3679,2841 3688,2832 3688,2828
  region net 5V: 3702,2718 3702,2773 3680,2795 3692,2807 3692,2880 3689,2880 3674,2895
  region net VCC: 3851.79,2712 3900.02,2712.98 3912.05,2773.58 3969.29,2792 3894.26,2792 3860,2753 3842.5,2729.5
PWR (plane layer: these items are gaps in the copper):
  lines w20: 3960,2213 2692,2213 2690,2211 2690,2951 2701,2962 2785,2962 2797,2950 2797,2784 2948,2633 3864,2633 3964,2533 3964,2201 ; 3811,3311 3889,3233 3889,2887 3843,2841 3843,2696 3853,2686 4205,2686 4237,2654 4237,3396 4211,3422 3866,3422 3811,3367 3811,3311

## Silkscreen, mask and mechanical layers (free items; w line width, h text height)
Top Overlay:
  lines w10: 1953,3765 4156,3765 ; 1956,2484 4150,2484 ; 1952,2282 4157,2282 4157,2603 1952,2603 1952,2282 ; 1952,3634 4157,3634 4157,3974 1952,3974 1952,3634
  text "PE0" at 4063,3895 h15 r90
  text "GND" at 4057,3792 h15 r90
  text "PB8" at 2032,3713 h15 r90
  text "PC10" at 2819,3708 h15 r90
  text "PD13" at 3621,3708 h15 r90
  text "GND" at 4139,3707 h15 r90
  text "PD15" at 3530,3706 h15 r90
  text "PA13" at 3016,3705 h15 r90
  text "PD11" at 3732,3704 h15 r90
  text "PD5" at 2422,3703 h15 r90
  text "PA11" at 3127,3703 h15 r90
  text "PC12" at 2699,3702 h15 r90
  text "PB15" at 3903,3702 h15 r90
  text "PB6" at 2120,3701 h15 r90
  text "PD7" at 2330,3701 h15 r90
  text "PC9" at 3320,3701 h15 r90
  text "PD9" at 3830.71,3701 h15 r90
  text "PD1" at 2611,3700 h15 r90
  text "PD3" at 2533,3699 h15 r90
  text "PA15" at 2922,3699 h15 r90
  text "PA9" at 3228,3699 h15 r90
  text "PB4" at 2231,3697 h15 r90
  text "PC7" at 3431,3697 h15 r90
  text "5V" at 4143,3657 h15 r90
  text "PD0" at 2720,3648 h15 r90
  text "PD6" at 2423,3647 h15 r90
  text "PC11" at 2816,3647 h15 r90
  text "PD2" at 2532,3646 h15 r90
  text "PB7" at 2121,3645 h15 r90
  text "PD2" at 2627,3645 h15 r90
  text "PA12" at 3015,3645 h15 r90
  text "PC8" at 3321,3645 h15 r90
  text "PB5" at 2230,3644 h15 r90
  text "PB3" at 2330,3644 h15 r90
  text "PA10" at 3124,3644 h15 r90
  text "PC6" at 3430,3644 h15 r90
  text "PD14" at 3530,3644 h15 r90
  text "PD8" at 3830.71,3644 h15 r90
  text "PE0" at 4118,3644 h15 r90
  text "PD12" at 3623,3643 h15 r90
  text "PB9" at 2028,3642 h15 r90
  text "PA14" at 2922,3642 h15 r90
  text "PA8" at 3228,3642 h15 r90
  text "PD10" at 3732,3642 h15 r90
  text "VBAT" at 3923,3641 h15 r90
  text "PA2" at 2708,2557 h15 r90
  text "PC0" at 2411,2556 h15 r90
  text "PA0" at 2616,2555 h15 r90
  text "PE2" at 2109,2554 h15 r90
  text "PE6" at 2319,2554 h15 r90
  text "PC4" at 3003,2554 h15 r90
  text "PE9" at 3309,2554 h15 r90
  text "3V3" at 4036,2554 h15 r90
  text "5V" at 4107,2554 h15 r90
  text "PA4" at 2819,2553 h15 r90
  text "PE0" at 2017,2552 h15 r90
  text "PC2" at 2522,2552 h15 r90
  text "PA6" at 2911,2552 h15 r90
  text "PE7" at 3217,2552 h15 r90
  text "PE15" at 3611,2552 h15 r90
  text "PE4" at 2220,2550 h15 r90
  text "PB1" at 3114,2550 h15 r90
  text "PE11" at 3420,2550 h15 r90
  text "PE13" at 3519,2550 h15 r90
  text "PB11" at 3722,2548 h15 r90
  text "PB13" at 3777,2542 h15 r90
  text "PA3" at 2709,2501 h15 r90
  text "PC1" at 2412,2500 h15 r90
  text "PA5" at 2818,2500 h15 r90
  text "PC3" at 2521,2499 h15 r90
  text "PE3" at 2110,2498 h15 r90
  text "PA1" at 2616,2498 h15 r90
  text "PC5" at 3004,2498 h15 r90
  text "PE8" at 3310,2498 h15 r90
  text "PE5" at 2219,2497 h15 r90
  text "PC13" at 2319,2497 h15 r90
  text "PB0" at 3113,2497 h15 r90
  text "PE10" at 3419,2497 h15 r90
  text "GND" at 4107,2497 h15 r90
  text "PE14" at 3612,2496 h15 r90
  text "PE1" at 2017,2495 h15 r90
  text "PA7" at 2911,2495 h15 r90
  text "PB2" at 3217,2495 h15 r90
  text "PE12" at 3519,2493 h15 r90
  text "PB10" at 3724,2491 h15 r90
  text "PB12" at 3798,2491 h15 r90
  text "VDDA" at 4032,2490 h15 r90
  text "VERF+" at 3969,2400 h15 r90
  text "PB14" at 3965,2303 h15 r90